# Altium PCB My电磁_V5.PcbDoc
Units mil, origin at the board's own origin, x right, y up, seen from the top; angles counter-clockwise.
Board outline 1574.8 x 1811.02 mil, 2 copper layers (Top Layer, Bottom Layer); 52 components, 31 nets, 124 pads, 10 vias.
Unrouted connection lines stored in the file: 27.
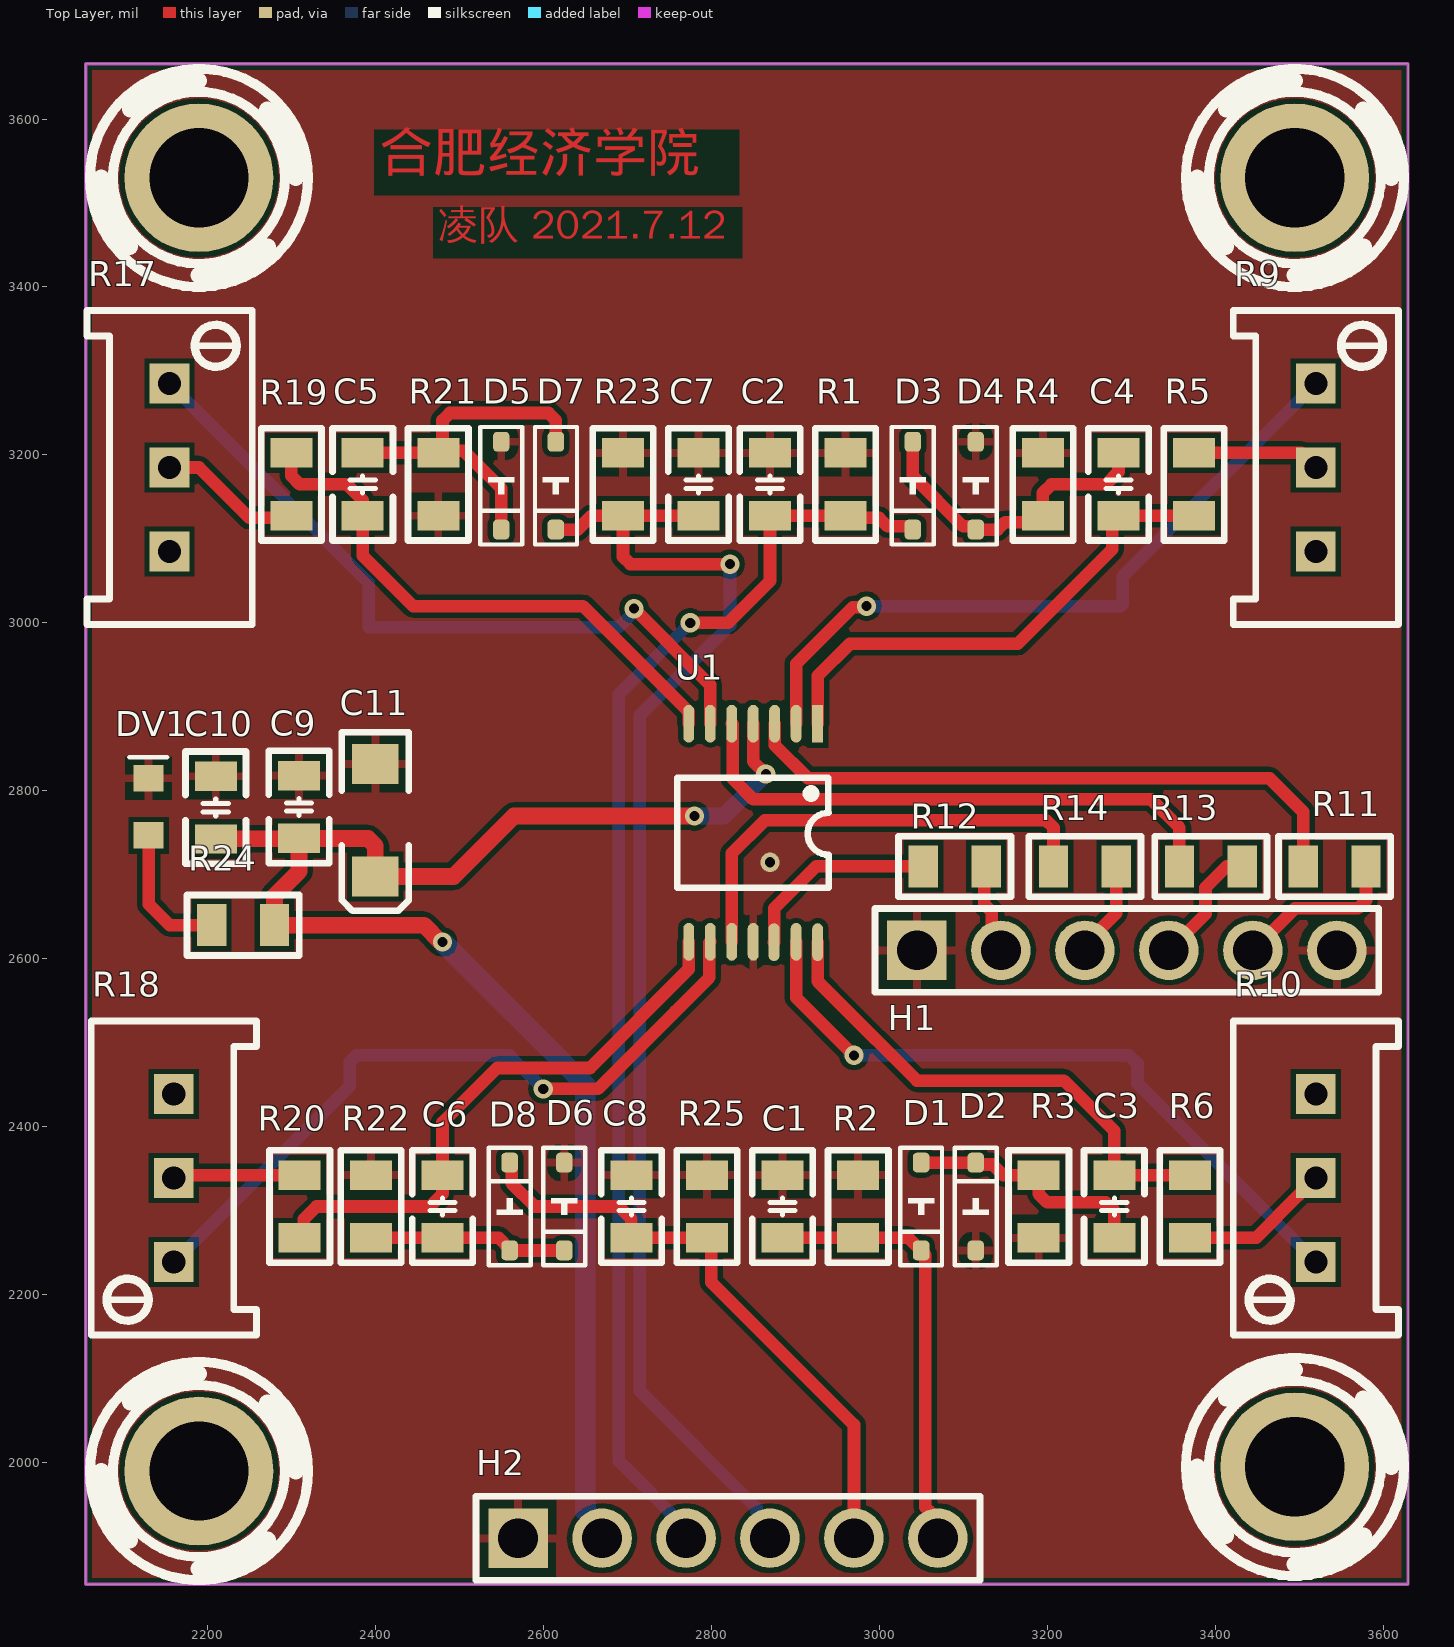
[diagram p0: Top Layer view]
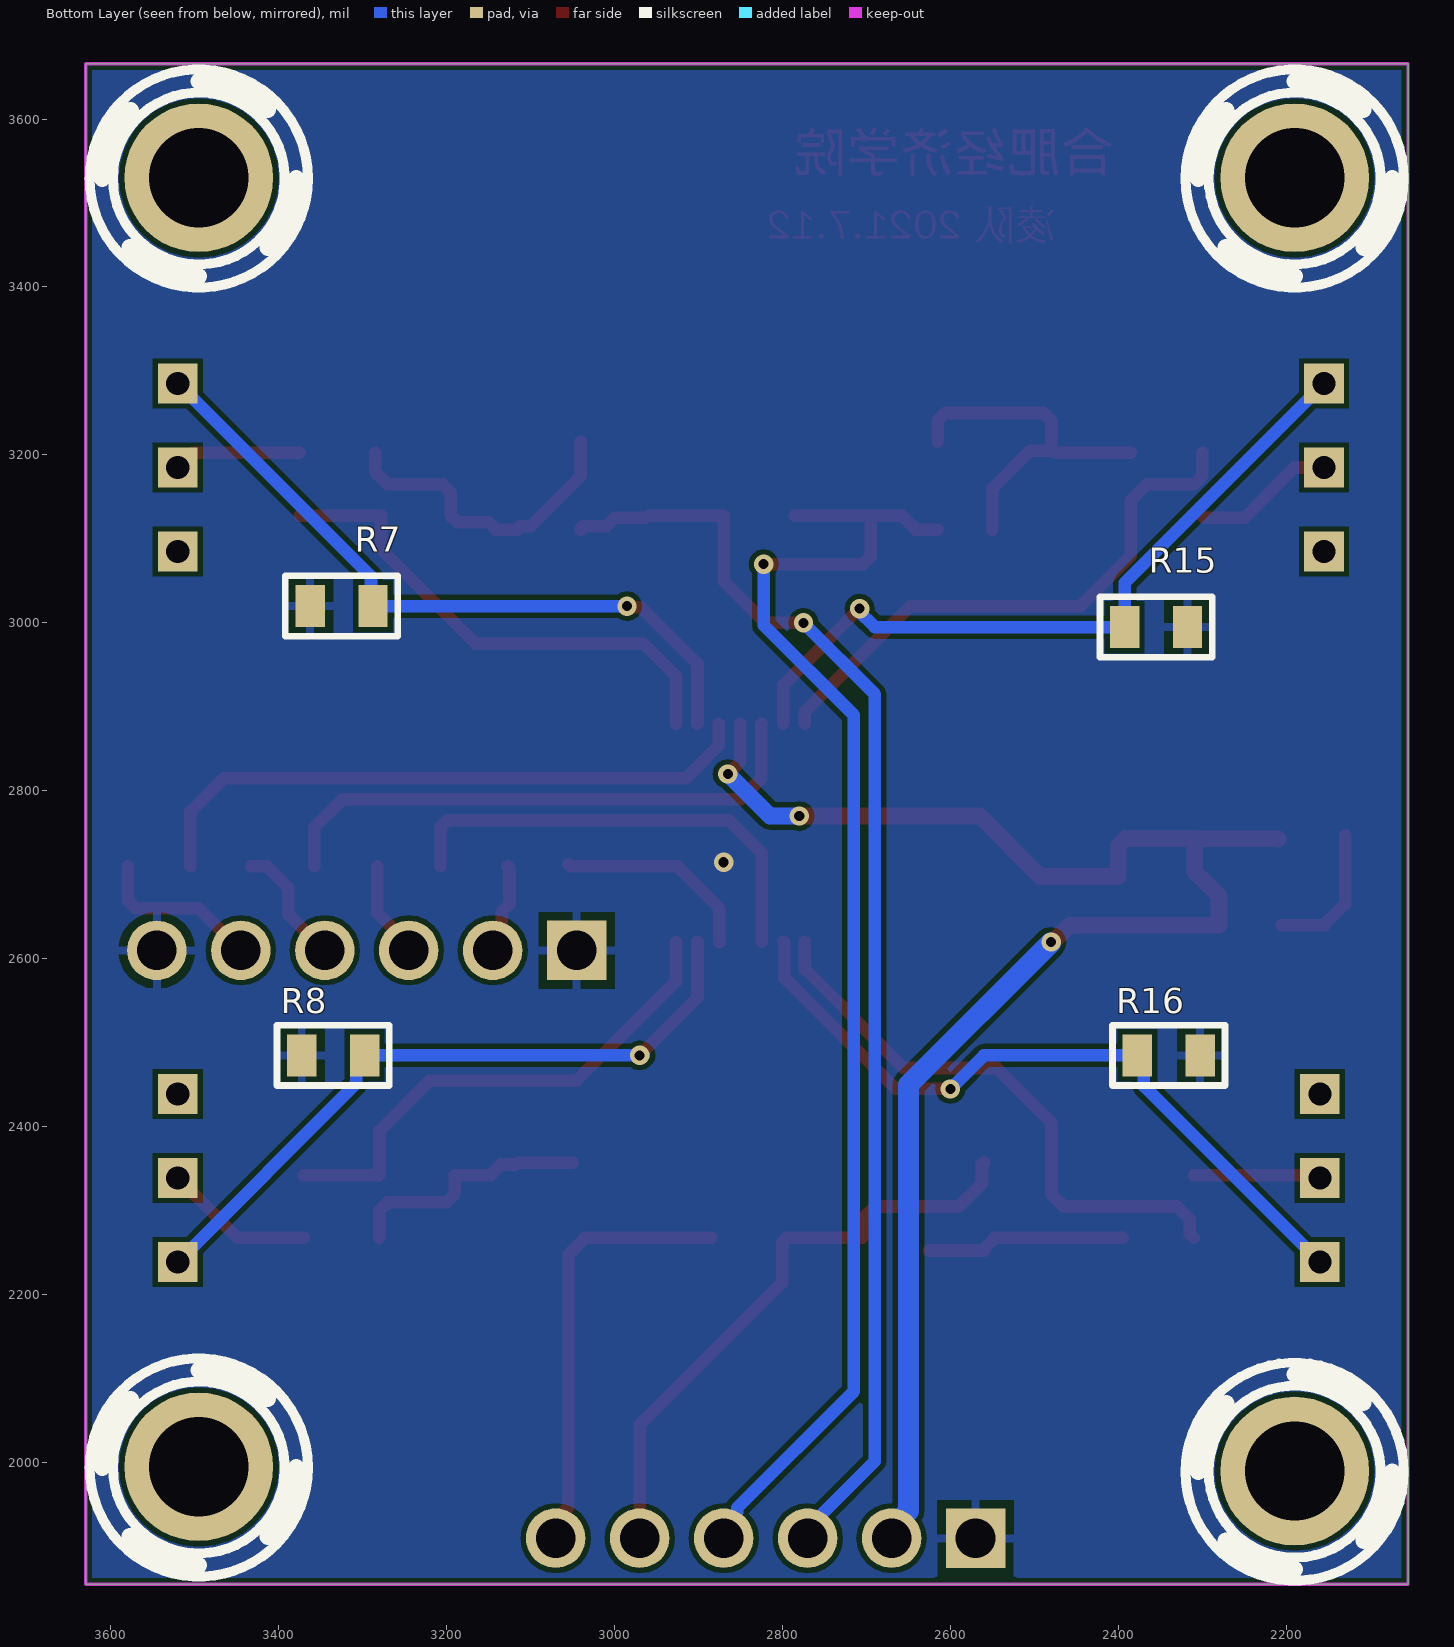
[diagram p1: Bottom Layer view, seen from below]
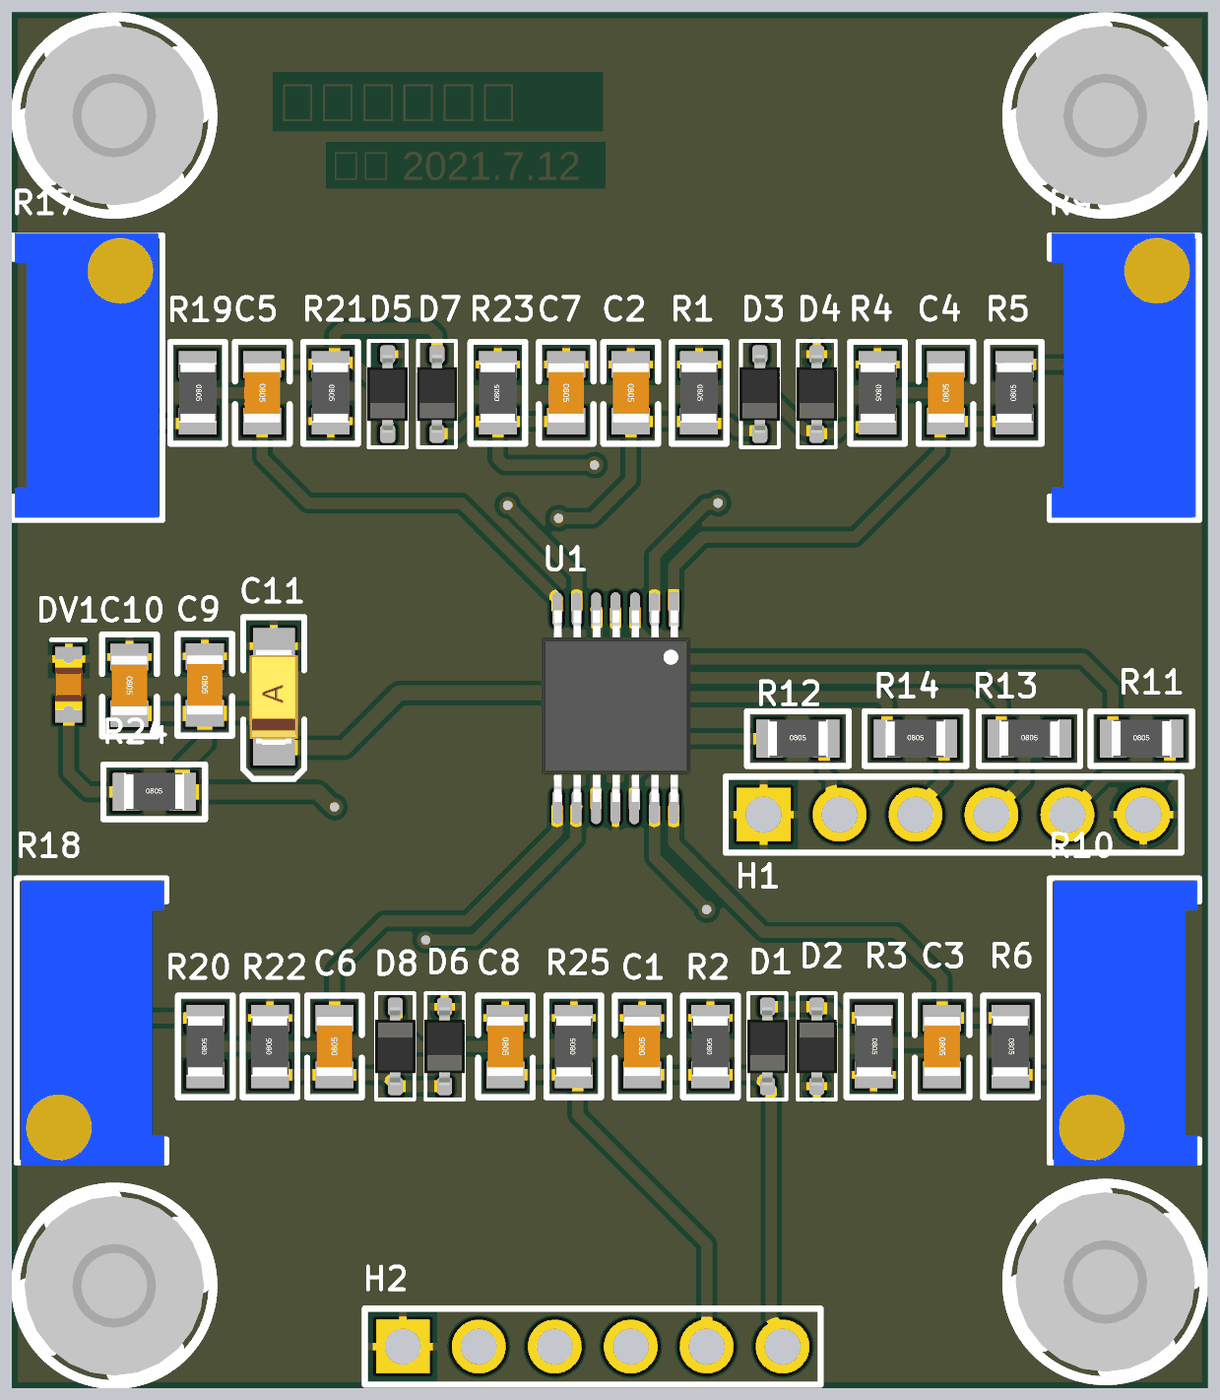
[diagram p2: 3D render of the assembled board from above, using the file's embedded part models]
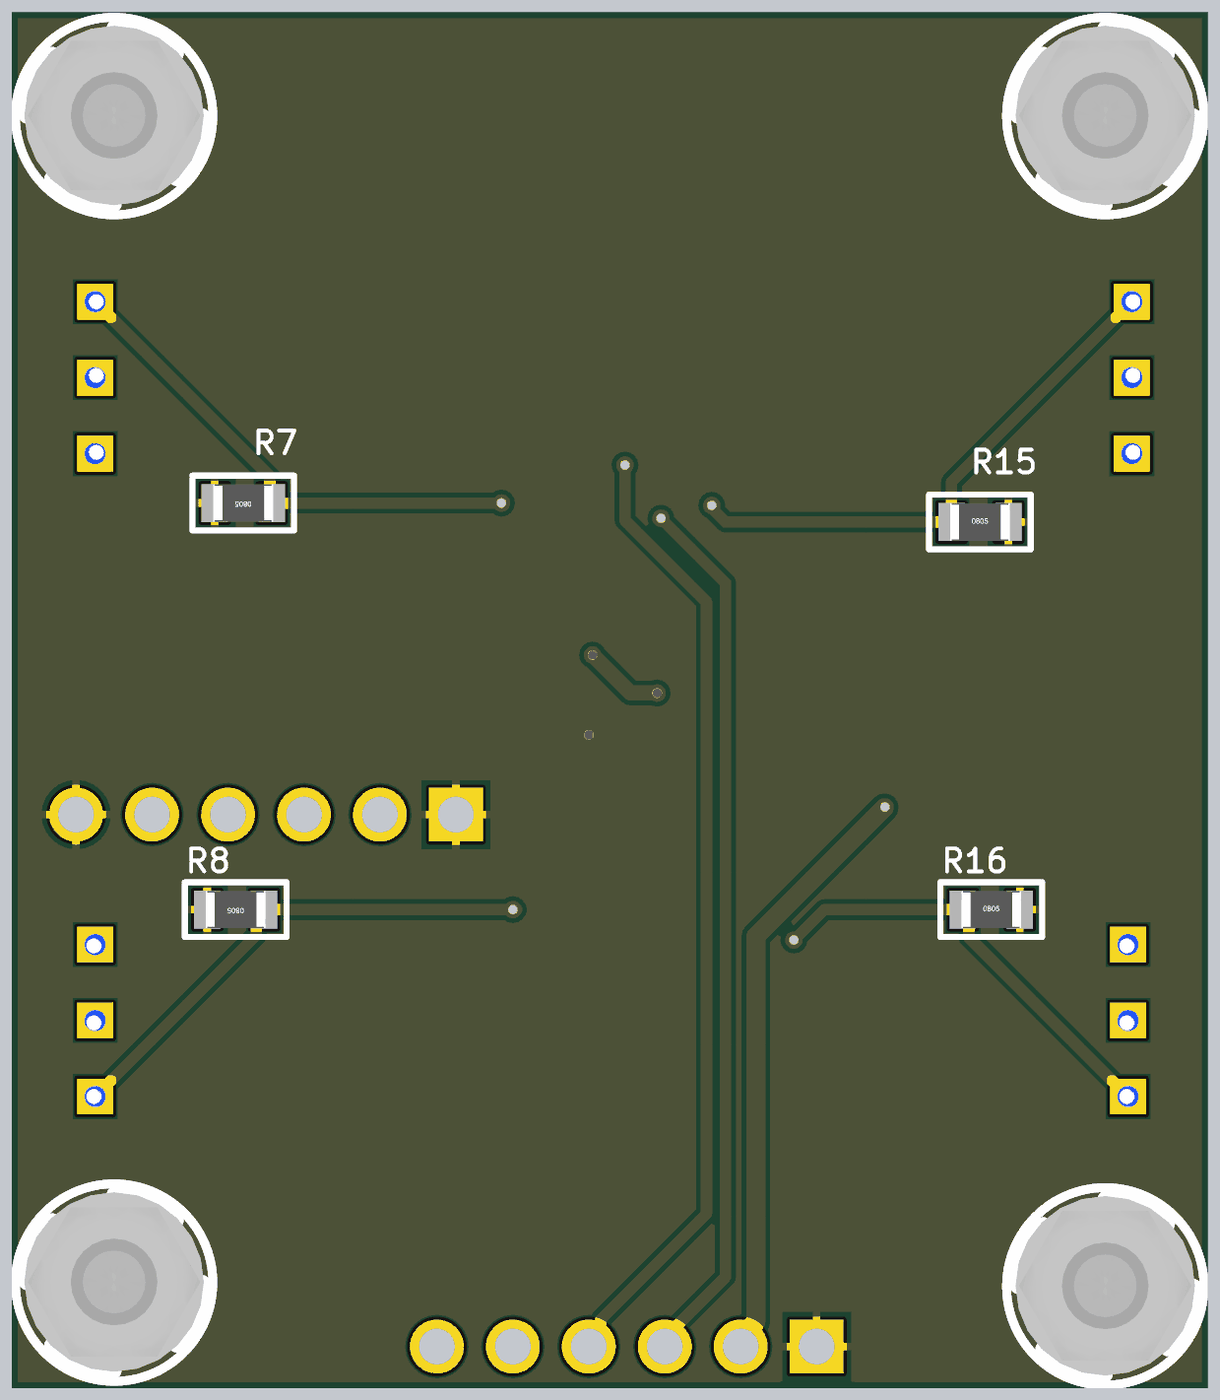
[diagram p3: 3D render of the assembled board from below, using the file's embedded part models]

## Layer stack, top to bottom
Top Solder: solder mask 0.4, Solder Resist, Dk 3.5
Top Layer: signal copper 1.4
Dielectric 1: dielectric 12.6, FR-4, Dk 4.8
Bottom Layer: signal copper 1.4
Bottom Solder: solder mask 0.4, Solder Resist, Dk 3.5

## Board outline
2055,1855 2055,3666.02 3629.8,3666.02 3629.8,1855

## Design rules (kind name [scope] priority, off if disabled: settings)
Clearance [All] p1: gap=6 ignorepadtopadclearanceinfootprint=FALSE
PlaneConnect [All] p1: pad.planeconnectstyle=Relief pad.reliefexpansion=20 pad.reliefentries=4 pad.reliefconductorwidth=10 pad.reliefairgap=10 via.planeconnectstyle=Direct via.reliefexpansion=20 via.reliefentries=4 via.reliefconductorwidth=10 via.reliefairgap=10
PolygonConnect [All] p1: thpad.connectstyle=Relief thpad.reliefconductorwidth=10 thpad.reliefentries=4 thpad.polygonreliefangle="90 Angle" thpad.airgapwidth=10 smdpad.connectstyle=Relief smdpad.reliefconductorwidth=10 smdpad.reliefentries=4 smdpad.polygonreliefangle="90 Angle" smdpad.airgapwidth=10 via.connectstyle=Direct via.reliefconductorwidth=10 via.reliefentries=4 via.polygonreliefangle="90 Angle" via.airgapwidth=10
RoutingVias [All] p1: holewidth=12 width=23 viastyle="Through Hole" minholewidth=12 minwidth=22 maxholewidth=12 maxwidth=50
SolderMaskExpansion [All] p1: expansion=4 istentingtop=FALSE
Width [All] p1: maxlimit=50 minlimit=10 preferedwidth=15
29 further rules are at their usual default settings.

## Classes and differential pairs
component class My电磁_V5: C1 C2 C3 C4 C5 C6 C7 C8 C9 C10 C11 D1 D2 D3 D4 D5 D6 D7 D8 DV1 H1 H2 R1 R2 R3 R4 R5 R6 R7 R8 R9 R10 R11 R12 R13 R14 R15 R16 R17 R18 R19 R20 R21 R22 R23 R24 R25 U1

## Components (designator, comment, footprint, x,y, rotation, side; value= is the part's Value field where it differs from the comment)
C1 "100nF/10%" "C 0805_L" 2885,2305 r90 top
C2 "100nF/10%" "C 0805_L" 2870,3165 r270 top
C3 "22nF/10%" "C 0805_L" 3280,2305 r270 top
C4 "22nF/10%" "C 0805_L" 3285,3165 r90 top
C5 "22nF/10%" "C 0805_L" 2385,3165 r270 top
C6 "22nF/10%" "C 0805_L" 2480,2305 r90 top
C7 "100nF/10%" "C 0805_L" 2785,3165 r270 top
C8 "100nF/10%" "C 0805_L" 2705,2305 r270 top
C9 "100nF" "C 0805_L" 2309.23,2780.77 r270 top
C10 "100nF" "C 0805_L" 2210,2780 r270 top
C11 "100uF" "CD A(3216)" 2400,2765 r90 top
D1 "1N5819" SOD-323 3050,2305 r270 top
D2 "1N5819" SOD-323 3115,2305 r90 top
D3 "1N5819" SOD-323 3040,3163.43 r270 top
D4 "1N5819" SOD-323 3115,3163.43 r270 top
D5 "1N5819" SOD-323 2550,3163.43 r270 top
D6 "1N5819" SOD-323 2625,2305 r270 top
D7 "1N5819" SOD-323 2615,3163.43 r270 top
D8 "1N5819" SOD-323 2560,2305 r90 top
DV1 "Red-0603" LQ_LED0603R 2130,2747 r90 top
H1 "68000-406HLF" HDR-TH_6P-P2.54-V 3295,2610 r0 top
H2 "68000-406HLF" HDR-TH_6P-P2.54-V 2820,1910 r0 top
R1 "Res2" "R 0805_L" 2960,3165 r270 top value=47k/1%
R2 "Res2" "R 0805_L" 2975,2305 r90 top value=47k/1%
R3 "Res2" "R 0805_L" 3190,2305 r270 top value=510R/1%
R4 "Res2" "R 0805_L" 3195,3165 r270 top value=510R/1%
R5 "Res2" "R 0805_L" 3375,3165 r90 top value=47k/1%
R6 "Res2" "R 0805_L" 3370,2305 r270 top value=47k/1%
R7 "Res2" "R 0805_L" 3325,3020 r0 bottom value=1k/1%
R8 "Res2" "R 0805_L" 3335,2485 r0 bottom value=1k/1%
R9 "100k" 电位计 3520,3184 r90 top
R10 "100k" 电位计 3520,2340 r270 top
R11 "Res2" "R 0805_L" 3542.4,2710 r0 top value=1K/1%
R12 "Res2" "R 0805_L" 3090,2710 r0 top value=1K/1%
R13 "Res2" "R 0805_L" 3395,2710 r0 top value=1K/1%
R14 "Res2" "R 0805_L" 3245,2710 r0 top value=1K/1%
R15 "Res2" "R 0805_L" 2355,2995 r180 bottom value=1K/1%
R16 "Res2" "R 0805_L" 2340,2485 r180 bottom value=1k/1%
R17 "100k" 电位计 2155,3184 r90 top
R18 "100k" 电位计 2160,2340 r270 top
R19 "Res2" "R 0805_L" 2300,3165 r270 top value=47k/1%
R20 "Res2" "R 0805_L" 2310,2305 r90 top value=47k/1%
R21 "Res2" "R 0805_L" 2475,3165 r270 top value=510R/1%
R22 "Res2" "R 0805_L" 2395,2305 r90 top value=510R/1%
R23 "Res2" "R 0805_L" 2695,3165 r90 top value=47k/1%
R24 "Res2" "R 0805_L" 2242.6,2640 r0 top value=1K
R25 "Res2" "R 0805_L" 2795,2305 r90 top value=47k/1%
SCROW1 "SCROW" LQ_SCROW3&5mm 3495,1995 r0 top
SCROW2 "SCROW" LQ_SCROW3&5mm 2190,3530 r0 top
SCROW3 "SCROW" LQ_SCROW3&5mm 3495,3530 r0 top
SCROW4 "SCROW" LQ_SCROW3&5mm 2190,1990 r0 top
U1 "opa4377" TSSOP-14 2926.77,2880 r270 top

## Footprints (in the part's own frame and the unit in brackets; to place one, negate y for a bottom-side part, rotate by r counter-clockwise, add the part's x,y. Pads: shape width x height; smd on the part's side, far side on the other; paste and mask are expansions set on the pad)
"C 0805_L" [mil]
  rect 35x50 smd: 1(-37.4,0) 2(37.4,0)
  silkscreen extent -67,-36 67,36, body extent -39,-24 39,24, height 20
"CD A(3216)" [mm]
  rect 1.2x1.4 smd: 1(-1.7,0) 2(1.7,0)
  silkscreen extent -2.74,-1.02 2.67,1.02, body extent -1.6,-0.8 1.6,0.8, height 1.6
HDR-TH_6P-P2.54-V [mm]
  rect 1.8x1.8 hole 1.2: 1(-6.35,0)
  round 1.8 hole 1.2: 2(-3.81,0) 3(-1.27,0) 4(1.27,0) 5(3.81,0) 6(6.35,0)
  silkscreen extent -7.62,-1.27 7.62,1.27
LQ_LED0603R [mm]
  rect 0.8x0.9 smd: 1(0,0) 2(1.727,0)
  silkscreen extent 2.36,-0.56 2.36,0.58, body extent 0.02,-0.45 1.72,0.45, height 0.9
LQ_SCROW3&5mm [mm]
  round 4.5 hole 3: 1(0,0)
  silkscreen extent -3.3,-3.3 3.3,3.3, body extent -3,-3 3,3, height 1.3
"R 0805_L" [mil]
  rect 35x50 smd: 1(-37.4,0) 2(37.4,0)
  silkscreen extent -67,-36 67,36, body extent -39,-25 39,25, height 20
SOD-323 [mm]
  rrect50% 0.6x0.5 smd: 1(-1.329,0) 2(1.329,0)
  silkscreen extent -1.78,-0.64 1.78,0.64, body extent -1.3,-0.68 1.3,0.67, height 1.15
TSSOP-14 [mm]
  rect 1.143x0.33 smd: 1(0,0)
  oval 1.143x0.33 smd: 2(0,-0.65) 3(0,-1.3) 4(0,-1.95) 5(0,-2.6) 6(0,-3.25) 7(0,-3.9) 8(6.6,-3.9) 9(6.6,-3.25) 10(6.6,-2.6) 11(6.6,-1.95) 12(6.608,-1.321) 13(6.6,-0.65) 14(6.608,0)
  silkscreen extent 1.63,-4.25 4.96,0.33, body extent 0.03,-4.43 6.43,0.57, height 1.03
电位计 [mm]
  rect 1.2x1.2 hole 0.7: 1(-2.515,0) 2(0.025,0) 3(2.565,0)
  silkscreen extent -4.72,-2.5 4.78,2.5, body extent -4.66,-2.36 4.87,2.44, height 11.55

## Part data
C1 C2 C3 C4 C5 C6 C7 C8 C9 C10: library part Cap, "Capacitor"
C11: library part CAP-AUX
D1 D2 D3 D4 D5 D6 D7 D8: "肖特基二极管", BOM名称=肖特基二极管, 学习资源=www.ooocke.com, 属性=40V/2A, 版权归属=源创客
DV1: library part LED2, "Typical RED, GREEN, YELLOW, AMBER GaAs LED", LatestRevisionDate=17-Jul-2002, LatestRevisionNote="Re-released for DXP Platform.", PackageDescription="SM LED; 2 Flat Leads", PackageReference=3.2X1.6X1.1, PackageVersion=Feb-2002, Published=8-Jun-2000, Publisher="Altium Limited"
H1 H2: BOM_JLCPCB Part Class="Extended Part", BOM_Manufacturer="Amphenol ICC", BOM_Manufacturer Part=68000-406HLF, BOM_Supplier=LCSC, BOM_Supplier Part=C178289, Contributor=LCSC, spicePre=H, spiceSymbolName=68000-406HLF
R1 R2 R3 R4 R5 R6 R7 R8 R11 R12 R13 R14 R15 R16 R19 R20 R21 R22 R23 R24 R25: library part "R 0805", "Resistor", LatestRevisionDate=17-Jul-2002, LatestRevisionNote="Re-released for DXP Platform.", PackageDescription="Axial Device, Thru-Hole; 2 Leads; 0.4 in Pin Spacing", PackageReference=AXIAL-0.4, Published=8-Jun-2000, Publisher="Altium Limited"
R9 R10 R17 R18: library part 电位器, "节电实验室"
SCROW1 SCROW2 SCROW3 SCROW4: "Connector"

## Via types
v1: diameter 23, hole 12, Top Layer to Bottom Layer, tented both sides, 10 vias

## Nets (pads, with @x,y where several pads share a name; then routed paths per layer and width w, separated by ;. In a path a pad name is that pad's centre, name@x,y a point inside that pad or via, vN(x,y) a via of type N, cw(c..) or ccw(c..) an arc to the next point about the centre after c; other vN are vias at no path point)
GND: C1.2 C2.1 C7.1 C8.1 C9.1 C10.1 C11.2 D2.1 D4.1 D5.1 D6.1 DV1.2 H1.1 H1.6 H2.1 R1.1 R2.2 R3.2 R4.1 R7.2 R8.2 R15.2 R16.2 R21.2 R22.2 R23.2 R25.2 U1.11
  other v1: 2870,2715
IN1: H1.5 R11.2 | length 199.8
  Top Layer w15: H1.5 3495,2660 3570,2660 3579.8,2669.8 R11.2
IN2: H1.4 R13.2 | length 147.1
  Top Layer w15: H1.4 3388.6,2653.6 3388.6,2684.81 3413.79,2710 R13.2
IN3: H1.3 R14.2 | length 115.5
  Top Layer w15: H1.3 3245,2617.13 3282.4,2654.53 R14.2
IN4: H1.2 R12.2 | length 109.3
  Top Layer w15: R12.2 3125,2707.6 3125,2665 3134.31,2655.69 3134.31,2620.69 H1.2
NetC3_1: C3.1 R6.1 U1.14 | length 616.3
  Top Layer w15: U1.14 2926.77,2573.23 2950,2550 3045,2455 3220,2455 3280,2395 C3.1 R6.1
NetC3_2: C3.2 D1.1 D2.2 R3.1 | length 299.3
  Top Layer w15: D1.1 D2.2 3117.34,2355 3135,2355 3147.6,2342.4 R3.1 3190,2320 3200,2310 3270,2310 3280,2300 C3.2
NetC4_1: C4.1 R5.1 U1.1 | length 607.5
  Top Layer w15: U1.1 2926.77,2936.77 2965,2975 3165,2975 3277.5,3087.5 3277.5,3127.6 R5.1
NetC4_2: C4.2 D3.1 D4.2 R4.2 | length 380.1
  Top Layer w15: D3.1 3040,3175 3100,3115 3112.66,3115 3115,3112.66 D4.2 3141.09,3111.09 3150,3120 3187.4,3120 R4.2 3195,3155 3205,3165 3270,3165 3285,3180 C4.2
NetC5_1: C5.1 D5.2 D7.1 R21.1 | length 442.2
  Top Layer w15: C5.1 R21.1 ; D5.2 2550,3160 2505,3205 2477.59,3205 R21.1 ; D7.1 2615,3241.21 2606.21,3250 2488.79,3250 2480,3241.21 2480,3207.41 R21.1
NetC5_2: C5.2 R19.1 U1.7 | length 669.8
  Top Layer w15: R19.1 2300,3175 2310,3165 2366.21,3165 2385,3146.21 C5.2 2385,3080 2445,3020 2647.22,3020 2771.22,2896 2773.23,2894 U1.7
NetC6_1: C6.1 D6.2 D8.1 R22.1 | length 237.3
  Top Layer w15: R22.1 C6.1 2547.03,2267.6 2560,2254.63 D8.1 D6.2
NetC6_2: C6.2 R20.1 U1.8 | length 688.3
  Top Layer w15: R20.1 2315,2272.59 2315,2290 2330,2305 2465,2305 2480,2320 C6.2 2480,2405 2545.01,2470 2655.61,2470 2773.23,2587.62 U1.8
NetDV1_1: DV1.1 R24.1 | length 167.6
  Top Layer w15: DV1.1 2130,2665 2155,2640 R24.1
NetR5_2: R5.2 R9.2 | length 152.2
  Top Layer w15: R5.2 3502.6,3202.4 R9.2
NetR6_2: R6.2 R10.2 | length 179.6
  Top Layer w15: R6.2 3448.71,2267.6 3499.57,2318.46 3499.57,2318.57 R10.2
NetR7_1: R7.1 R9.3 U1.2 | length 847.4
  Top Layer w15: U1.2 2901.18,2951.18 2968.47,3018.47 2983.47,3018.47 v1(2985,3020)
  Bottom Layer w15: v1(2985,3020) R7.1 3290,3022.41 3290,3055 R9.3
NetR8_1: R8.1 R10.3 U1.13 | length 834.4
  Top Layer w15: U1.13 2901.18,2553.82 v1(2970,2485)
  Bottom Layer w15: v1@2965,2485 R8.1 3307.59,2475 3307.59,2451.41 R10.3
NetR11_1: R11.1 U1.3 | length 752.9
  Top Layer w15: U1.3 2875.59,2854.41 2915,2815 3465,2815 3505,2775 R11.1
NetR12_1: R12.1 U1.12 | length 242
  Top Layer w15: U1.12 2875,2620.07 2875,2660 2925,2710 R12.1 R12.1@3055,2712.4
NetR13_1: R13.1 U1.5 | length 668.4
  Top Layer w15: U1.5 2825.41,2879 2825.41,2814.59 2850,2790 3323.81,2790 3357.6,2756.21 R13.1
NetR14_1: R14.1 U1.10 | length 554.8
  Top Layer w15: U1.10 2824.41,2725.59 2863.82,2765 3198.81,2765 3207.6,2756.21 R14.1
NetR15_1: R15.1 R17.3 U1.6 | length 888.7
  Top Layer w15: v1(2708.09,3016.91) 2798.82,2926.18 U1.6
  Bottom Layer w15: R17.3 2392.4,3047.6 R15.1 2690,2995 v1@2710,3015
NetR16_1: R16.1 R18.3 U1.9 | length 870.8
  Top Layer w15: v1(2600,2445) 2665,2445 2757.42,2537.42 2797.82,2577.82 2797.82,2619.15 U1.9
  Bottom Layer w15: R18.3 2369.54,2448.54 2369.54,2477.13 R16.1 2560,2485 v1(2600,2445)
NetR17_2: R17.2 R19.2 | length 170.9
  Top Layer w15: R17.2 2190,3185 2250,3125 2297.4,3125 R19.2
NetR18_2: R18.2 R20.2 | length 151.4
  Top Layer w15: R18.2 2163.4,2342.4 R20.2
OUT1: C2.2 D3.2 H2.3 R1.2 | length 1529.4
  Top Layer w15: v1(2775,3000) 2820,3000 2870,3050 C2.2 R1.2 2962.6,3125 3000,3125 3010,3115 3037.66,3115 3040,3112.66 D3.2
  Bottom Layer w15: H2.3 2770,1921.72 2690,2001.72 2690,2915 v1(2775,3000)
OUT2: C7.2 D7.2 H2.4 R23.1 | length 1625.3
  Top Layer w15: D7.2 2641.09,3111.09 2657.6,3127.6 R23.1 ; C7.2 R23.1 ; v1(2822.38,3070) 2703.79,3070 2695,3078.79 R23.1
  Bottom Layer w15: v1(2822.38,3070) 2822.38,2997.38 2715,2890 2715,2085 2854.04,1945.96 2854.04,1941.08 2870,1925.12 H2.4
OUT3: C8.2 D8.2 H2.5 R25.1 | length 728.5
  Top Layer w15: D8.2 2562.34,2355 2562.34,2332.66 2590,2305 2690,2305 2705,2290 C8.2 R25.1 2800,2262.6 2800,2215 2970,2045 H2.5
OUT4: C1.1 D1.2 H2.6 R2.1 | length 522.1
  Top Layer w15: C1.1 R2.1 3035.07,2267.6 D1.2 3055,2247.66 3055,1946.72 3059.31,1942.41 3059.31,1920.69 H2.6
VCC: C9.2 C10.2 C11.1 H2.2 R24.2 U1.4 | length 1923.2
  Top Layer w15: U1.4 2850,2835 v1(2865,2820)
  Top Layer w20: C10.2 2210.38,2742.99 2308.84,2742.99 C9.2 ; v1(2480,2620) 2477.84,2620 2457.84,2640 R24.2 2280,2675 2309.23,2704.23 C9.2 ; v1(2780,2770) 2565,2770 2493.07,2698.07 C11.1 2400,2734.59 2391.21,2743.37 C9.2
  Bottom Layer w20: v1(2780,2770) 2815,2770 v1(2865,2820)
  Bottom Layer w25: v1@2481.02,2618.98 2650,2450 2650,1942.41 2670,1922.41 H2.2
pads on no net: R9.1 R10.1 R17.1 R18.1 SCROW1.1 SCROW2.1 SCROW3.1 SCROW4.1

## Polygon pours and split planes (outlines as drawn)
GND on Top Layer "GND_L01_P000" (solid, remove dead copper, pour order 0): 2055,1855 2055,3666.02 3629.8,3666.02 3629.8,1855
GND on Bottom Layer "GND_L02_P001" (solid, remove dead copper, pour order 1): 2055,1855 2055,3666.02 3629.8,3666.02 3629.8,1855

## Keep-outs
Keep-Out Layer:
  the board outline again, w3.94

## Other copper
Top Layer:
  text "合肥经济学院" at 2405.07,3522.55 h80
  text "凌队 2021.7.12" at 2475,3445.44 h60